# Altium PCB Pallette_Rev1.PcbDoc
Units mil, origin at the board's own origin, x right, y up, seen from the top; angles counter-clockwise.
Board outline 3092.52 x 629.92 mil, 2 copper layers (Top Layer, Bottom Layer); 40 components, 24 nets, 233 pads, 125 vias.
Unrouted connection lines stored in the file: 13.
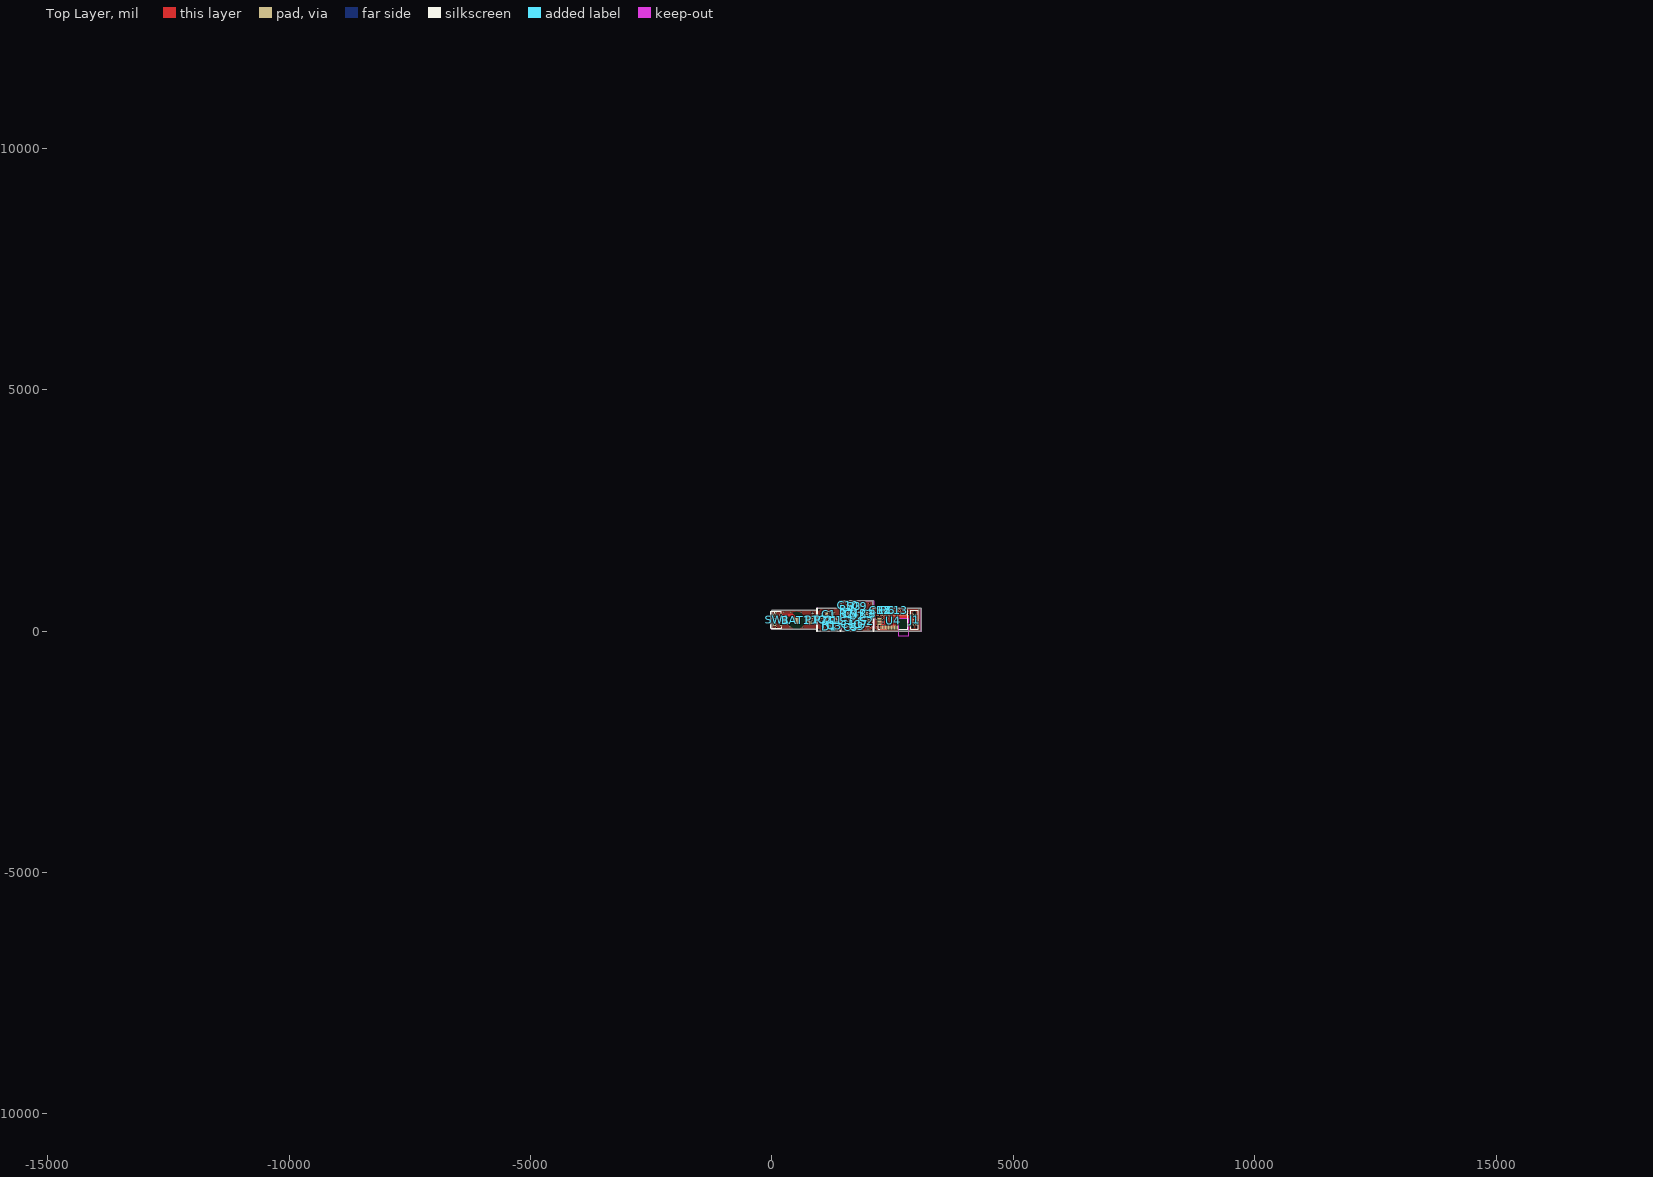
[diagram p0: Top Layer view]
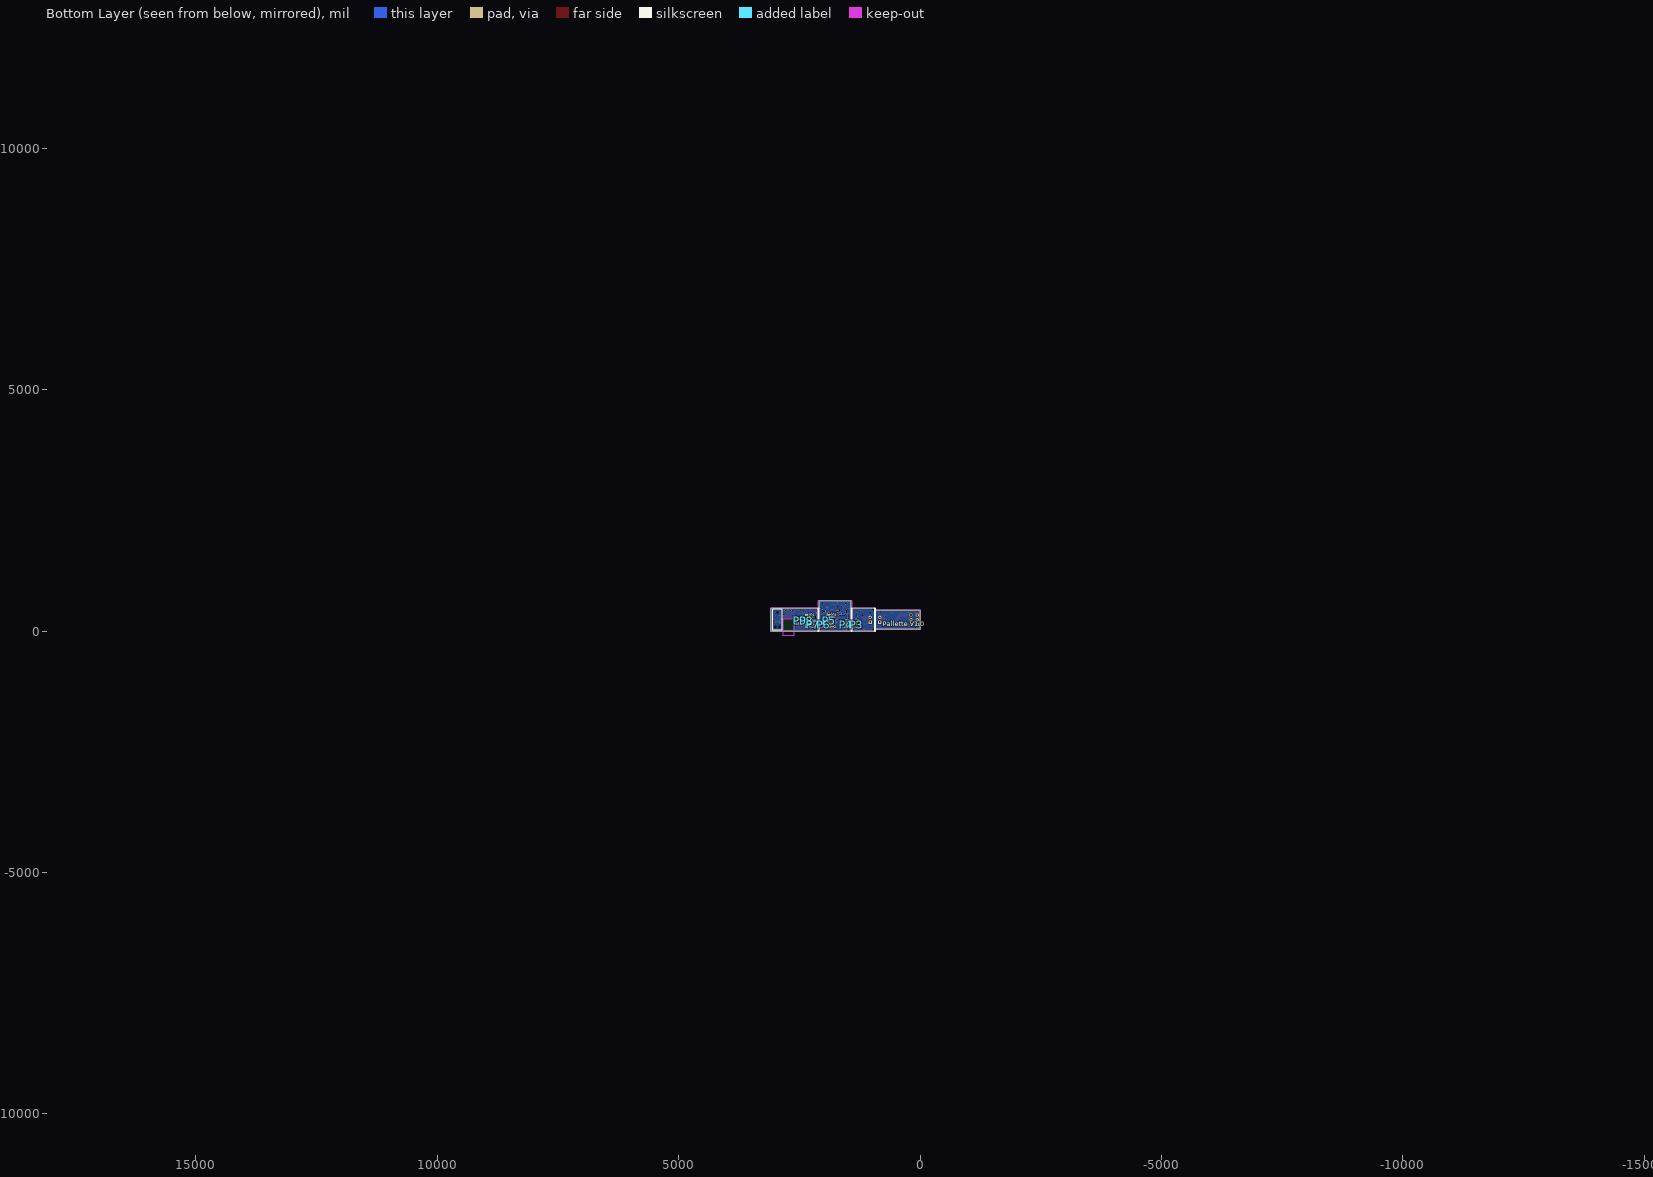
[diagram p1: Bottom Layer view, seen from below]

## Layer stack, top to bottom
Top Solder: solder mask 0.4, Solder Resist, Dk 3.5
Top Layer: signal copper 1.4
Dielectric 1: dielectric 12.6, FR-370HR, Dk 4.8
Bottom Layer: signal copper 1.4
Bottom Solder: solder mask 0.4, Solder Resist, Dk 3.5

## Board outline
0,39.37 0,433.07 934.06,433.07 934.06,472.44 1438.31,472.44 1438.31,629.92 2087.6,629.92 2087.6,472.44 3092.52,472.44 3092.52,0 934.06,0 934.06,39.37

## Design rules (kind name [scope] priority, off if disabled: settings)
Clearance Clearance_BAT [HasFootprintPad('BAT RETAINER 13', '2')] p1: gap=102.36
Clearance [All] p2: gap=4.92
ComponentClearance [All] p1: gap=3.94 collisioncheckmode=3 verticalgap=3.94 showdistances=FALSE
MinimumSolderMaskSliver [All] p1: minsoldermaskwidth=4.92
PolygonConnect PolygonConnect_Vias [IsVia] p1: connectstyle=Direct reliefconductorwidth=10 reliefentries=4 polygonreliefangle="90 Angle" airgapwidth=10
PolygonConnect [All] p2: connectstyle=Relief reliefconductorwidth=10 reliefentries=4 polygonreliefangle="90 Angle" airgapwidth=5
RoutingVias [All] p1: holewidth=5 width=15.75 viastyle="Through Hole" minholewidth=4 minwidth=15 maxholewidth=28 maxwidth=50
SolderMaskExpansion [All] p1: expansion=4
Width [All] p1: maxlimit=100 minlimit=5 preferedwidth=10
28 further rules are at their usual default settings.

## Components (designator, comment, footprint, x,y, rotation, side; value= is the part's Value field where it differs from the comment)
BAT1 "RETAINER COIN CELL 7.9MM" "BAT RETAINER 13" 507.88,226.38 r0 top
C1 "100uF" 1411 1191.93,348.43 r0 top
C2 "10uF" 0603 1116.14,235.24 r90 top
C3 "22uF" 0603 1298.23,109.25 r90 top
C4 "100nF" 0402 1660.43,357.28 r270 top
C5 "100nF" 0402 1646.57,82.76 r180 top
C6 "22uF" 0603 1609.25,362.2 r270 top
C7 "100nF" 0402 1853.35,141.73 r90 top
C8 "22uF" 0603 2020.67,362.2 r270 top
C9 "100nF" 0402 1830.71,520.67 r90 top
C10 "22uF" 0603 1576.77,539.37 r270 top
C11 "100nF" 0402 1667.4,141.81 r270 top
C12 "100nF" 0402 2246.06,437.01 r0 top
C13 "100nF" 0402 2591.54,437.01 r180 top
D1 "SML-D12V1WT86" "LED 0603" 1193.9,90.55 r180 top
J1 "HEADER PROG" TC2050-IDC-NL 2955.71,236.22 r270 top
L1 "10uH" 0805 1328.74,223.43 r270 top
P1 "HEADER M TH RA" "PORT PW TH 2P" 835.63,236.22 r0 top
P2 "HEADER F TH RA" "PORT PW TH 2P" 1032.48,236.22 r0 top
P3 "HEADER PW SMT" "PORT PW SMT 2P" 1314.96,136.22 r180 bottom
P4 "HEADER PW SMT" "PORT PW SMT 2P" 1531.5,136.22 r180 bottom
P5 "CONN 6P" "PORT CONN 6P" 1883.86,211.22 r180 bottom
P6 "HEADER PW SMT" "PORT PW SMT 2P" 1990.16,136.22 r180 bottom
P7 "HEADER PW SMT" "PORT PW SMT 2P" 2207.68,136.22 r180 bottom
P8 "CONN 6P" "PORT CONN 6P" 2345.47,211.22 r180 bottom
P9 "CONN 4P" "PORT CONN 4P" 2483.27,211.22 r180 bottom
R1 "220R" 0603 1192.91,134.84 r180 top
R2 "30R" 0402 1563.98,362.21 r90 top
R3 "30R" 0402 1976.38,362.21 r90 top
R4 "30R" 0402 1558.07,457.68 r180 top
R5 "4.7K" 0402 2322.83,437.01 r180 top
R6 "4.7K" 0402 2407.48,437.01 r0 top
S1 "Si1141-M01" SI1141-M01 1562.99,204.72 r0 top
S2 "Si1141-M01" SI1141-M01 1962.6,204.72 r0 top
S3 "Si1141-M01" SI1141-M01 1704.13,511.81 r90 top
SW1 "SW DPDT TH RA" "SW DPDT TH RA" 122.05,236.22 r270 top
U1 "XC9265A221MR-G" SOT-25 1220.47,222.44 r0 top
U2 "SN74LVC125A" VQFN14 1767.72,313.98 r0 top
U3 "SPW0430HR5HB-B" MIC-4P 1759.84,106.3 r90 top
U4 "BLE113-A-M256K" BLE113-A 2511.81,219.49 r270 top

## Footprints (in the part's own frame and the unit in brackets; to place one, negate y for a bottom-side part, rotate by r counter-clockwise, add the part's x,y. Pads: shape width x height; smd on the part's side, far side on the other; paste and mask are expansions set on the pad)
0402 [mm] "Body 1.0x0.5mm, IPC High Density"
  rect 0.6x0.7 smd: 1(-0.55,0) 2(0.55,0)
  silkscreen extent -0.5,-0.5 0.5,0.5, body extent -0.55,-0.3 0.55,0.3, height 1.3
0603 [mm] "Body 1.6x0.8mm, IPC High Density"
  rect 0.8x0.8 smd: 1(-0.8,0) 2(0.8,0)
  silkscreen extent -0.4,-0.55 0.4,0.55, body extent -0.81,-0.46 0.81,0.46, height 1.3
0805 [mm] "Body 2.0x1.25mm, IPC High Density"
  rect 1x1.2 smd: 1(-1,0) 2(1,0)
  silkscreen extent -0.5,-0.75 0.5,0.75, body extent -1.02,-0.65 1.02,0.65, height 1.3
1411 [mm] "Body 3.5x2.8mm, IPC High Density"
  rect 1.6x2.7 smd: 1(-1.5,0) 2(1.5,0)
  silkscreen extent -1,-1.5 1,1.5, body extent -1.52,-1.4 1.52,1.4, height 1.3
"BAT RETAINER 13" [mm] "Body 13.36x7.36mm"
  rect 2.03x3.18 smd: 0(-5.665,0) 1(5.665,0)
  round 4 smd paste-6 mask+2.45: 2(0,0)
  silkscreen extent -6.93,-1.83 6.93,1.83, body extent -6.68,-3.15 6.68,4.21, height 5.75
BLE113-A [mm] "Body 15.725x9.15mm"
  rrect50% 2.1x0.5 smd: 1(-3.775,7.075)
  rect 2.1x0.5 smd: 2(-3.775,6.275) 3(-3.775,5.475) 4(-3.775,4.675) 5(-3.775,3.875) 6(-3.775,3.075) 7(-3.775,2.275) 8(-3.775,1.475) 9(-3.775,0.675) 10(-3.775,-0.125) 11(-3.775,-0.925) 12(-3.775,-1.725) 13(-3.775,-2.525) 14(-3.775,-3.325) 15(-3.775,-4.125) 16(-3.775,-4.925) 17(-3.775,-5.725) 18(-3.775,-6.525) 25(3.775,-6.525) 26(3.775,-5.725) 27(3.775,-4.925) 28(3.775,-4.125) 29(3.775,-3.325) 30(3.775,-2.525) 31(3.775,-1.725) 32(3.775,-0.925) 33(3.775,-0.125) 34(3.775,0.675) 35(3.775,1.475) 36(3.775,2.275)
  rect 0.5x2.1 smd: 19(-2,-7.175) 20(-1.2,-7.175) 21(-0.4,-7.175) 22(0.4,-7.175) 23(1.2,-7.175) 24(2,-7.175)
  Keep-Out Layer region: -1.075,2.75 8.025,2.75 8.025,8.25 -1.075,8.25
  silkscreen extent -5.43,-7.98 4.57,7.78, body extent -4.57,-7.97 4.57,7.75, height 1.9
"LED 0603" [mm] "Body 1.6x0.8mm"
  rect 0.8x0.8 smd: 1(-0.825,0) 2(0.825,0)
  silkscreen extent -0.5,-0.55 0.5,0.55, body extent -0.8,-0.4 0.8,0.4, height 0.65
MIC-4P [mm] "Body 2.5x3.1mm"
  rect 0.79x0.55 smd: 1(-0.625,1.045) 2(-0.625,-1.045) 3(0.625,-1.045) 4(0.625,1.045)
  silkscreen extent -1.88,-1.55 1.25,1.55, body extent -1.25,-1.55 1.25,1.55, height 1.25
"PORT CONN 4P" [mm] "Body 4.75x2mm"
  oval 2x0.95 smd paste-10: 1(0,1.905) 2(0,0.635) 3(0,-0.635) 4(0,-1.905)
"PORT CONN 6P" [mm] "Body 7.2x2mm"
  oval 2x0.95 smd paste-10: 1(0,3.175) 2(0,1.905) 3(0,0.635) 4(0,-0.635) 5(0,-1.905) 6(0,-3.175)
"PORT PW SMT 2P" [mm] "Body 3.75x2mm"
  oval 2x1.2 smd paste-10: 1(0,1.27) 2(0,-1.27)
"PORT PW TH 2P" [mm] "Body 5.08x2.54mm"
  round 1.8 hole 1: 1(0,1.27)
  rect 1.8x1.8 hole 1: 2(0,-1.27)
  body extent -1.27,-2.54 1.27,2.54, height 2.54
SI1141-M01 [mm] "Body 4.9x2.85mm"
  rrect50% 1.35x0.65 smd: 1(-1.2,2)
  rect 1.35x0.65 smd: 2(-1.2,1) 3(-1.2,0) 4(-1.2,-1) 5(-1.2,-2) 6(1.2,-2) 7(1.2,-1) 8(1.2,0) 9(1.2,1) 10(1.2,2)
  silkscreen extent -2.3,-2.48 1.43,2.8, body extent -1.43,-2.45 1.43,2.45, height 1.3
SOT-25 [mm] "Body 2.9x2.8mm"
  rrect50% 1.35x0.65 smd: 1(-1.2,0.95)
  rect 1.35x0.65 smd: 2(-1.2,0) 3(-1.2,-0.95) 4(1.2,-0.95) 5(1.2,0.95)
  silkscreen extent -1.78,1.62 -1.52,1.88, body extent -0.8,-1.45 0.8,1.45, height 1.3
"SW DPDT TH RA" [mm] "Body 9x5.6mm"
  round 1.7 hole 0.9: 1(-2.5,1.65) 1(-2.5,-1.65) 2(0,1.65) 2(0,-1.65) 3(2.5,1.65) 3(2.5,-1.65)
  silkscreen extent -4.5,-3.77 4.5,1.83, body extent -4.5,-3.77 4.5,1.83, height 3.22
TC2050-IDC-NL [mil] "Programming pads"
  round 0 hole 39 unplated: 0(-150,0) 0(150,-40) 0(150,40)
  round 31 smd paste-50: 1(-100,-25) 2(-50,-25) 3(0,-25) 4(50,-25) 5(100,-25) 6(100,25) 7(50,25) 8(0,25) 9(-50,25) 10(-100,25)
  silkscreen extent -200,-80 200,80
VQFN14 [mm] "Body 3.65x3.65mm"
  rect 2.05x2.05 smd: 0(0,0)
  rect 0.85x0.28 smd mask+0.05: 1(-1.725,-0.75)
  oval 0.28x0.85 smd mask+0.05: 2(-1,-1.725) 3(-0.5,-1.725) 4(0,-1.725) 5(0.5,-1.725) 6(1,-1.725) 9(1,1.725) 10(0.5,1.725) 11(0,1.725) 12(-0.5,1.725) 13(-1,1.725)
  oval 0.85x0.28 smd mask+0.05: 7(1.725,-0.75) 8(1.725,0.75) 14(-1.725,0.75)
  silkscreen extent -2.5,-1.83 1.82,1.83, body extent -1.83,-1.82 1.83,1.83, height 1

## Part data
BAT1: library part "BAT RETAINER 13", "RETAINER COIN CELL 7.9MM SMD"
C1: library part "CAP Pol 100uF", "CAP TANT POLY 100UF 8V 1411"
C2: library part "CAP 10uF", "CAP CER 10UF ±20% 10V X5R 0603"
C3 C6: library part "CAP 22uF", "CAP CER 22UF 6.3V X5R 0603"
C4 C5 C7 C9 C11 C12 C13: library part "Cap 100nF", "CAP CER 0.1UF 10V X5R 0402"
C8 C10: library part "Cap 22uF", "CAP CER 22UF 6.3V X5R 0603"
D1: library part "LED SML-D12V1WT86", "LED Red 630nm 2.2V Diffused White Lens 0603"
J1: "PADS PROGRAMMING"
L1: library part "IND 10uH", "FIXED IND 10UH 500MA 320 MOHM"
P1: library part "HEADER PW TH MALE", "HEADER Male, Unshrouded, 2 Position, 0.100\", Through Hole, Right Angle, Gold"
P2: library part "HEADER PW TH FEMALE", "HEADER Female, 2 Position, 0.100\", Through Hole, Right Angle, Gold"
P3 P4 P6 P7: "Connection Port"
P5 P8: library part "HEADER CONN 6P", "Connection Port"
P9: library part "HEADER CONN 4P", "Connection Port"
R1: library part "RES 220R", "RES SMD 220 OHM 1% 1/10W 0603"
R2 R3 R4: library part "Res 30R", "RES SMD 30 OHM 1% 1/16W 0402"
R5 R6: library part "Res 4.7K", "RES SMD 4.7K OHM 1% 1/16W 0402"
S1 S2 S3: library part "SENS Si1141-M01", "SENS IR PROXIMITY AMB LT 10QFN"
SW1: library part "SW DPDT", "SW Slide Switch DPDT Through Hole, Right Angle"
U1: library part "VR XC9265A221MR-G", "IC REG BUCK 2.2V 0.2A SYNC SOT25"
U2: library part "BUFF SN74LVC125A", "IC BUS BUFF TRI-ST QD 14VQFN"
U3: library part "MIC SPW0430HR5HB-B", "MIC MEMS ANALOG OMNI"
U4: library part "uC BLE113", "MODULE BT 4.0 BLE113 OTA"

## Free pads (board coordinates)
  round 0 hole 118.11 unplated: 0(934.06,0) 0(934.06,472.44) 0(1423.23,0) 0(2102.36,0)
  round 10 on Drill Drawing: 1(-14528.58,-10332.83) 1(-14528.58,-4732.44) 1(-14528.58,867.95) 1(-14528.58,6468.35) 1(-14528.58,12068.74) 1(-14016.77,-9821.02) 1(-14016.77,-4732.44) 1(-9174.25,11556.93) 1(-9174.25,12068.74) 1(-3819.92,11556.93) 1(-3819.92,12068.74) 1(1534.41,11556.93) 1(1534.41,12068.74) 1(6888.74,11556.93) 1(6888.74,12068.74) 1(9469.45,-9466.69) 1(9469.45,-8876.14) 1(9469.45,-8324.96) 1(11140.71,-9338.74) 1(11140.71,-9132.05) 1(11140.71,-7685.2) 1(11901.17,-8324.96) 1(11910.39,-9466.69) 1(11910.84,-8876.14) 1(11984.41,-9079.13) 1(11994.88,-9566.1) 1(11994.88,-8112.6) 1(12243.07,12068.74) 1(12479.38,-9566.1) 1(12479.38,-9081.6) 1(13206.13,-9808.35) 1(15900.59,-9543.7) 1(15904.49,-9566.1) 1(15904.49,-9081.6) 1(17082.13,-9566.1) 1(17082.13,-8112.6) 1(17085.59,-9821.02) 1(17085.59,-4732.44) 1(17085.59,867.95) 1(17085.59,6468.35) 1(17089.41,-9079.13) 1(17597.4,-10332.83) 1(17597.4,-4732.44) 1(17597.4,867.95) 1(17597.4,6468.35) 1(17597.4,12068.74)
  round 30 on Drill Drawing: 1(9469.45,-7380.08)

## Via types
v1: diameter 29.53, hole 14.96, Top Layer to Bottom Layer, tented both sides, 121 vias
v2: diameter 27.56, hole 27.56, Top Layer to Bottom Layer, tented bottom, 4 vias

## Nets (pads, with @x,y where several pads share a name; then routed paths per layer and width w, separated by ;. In a path a pad name is that pad's centre, name@x,y a point inside that pad or via, vN(x,y) a via of type N, cw(c..) or ccw(c..) an arc to the next point about the centre after c; other vN are vias at no path point)
+2V2: C3.2 C4.2 C5.2 C7.2 C9.2 C11.1 C12.2 C13.2 J1.2 L1.2 P3.1 P4.1 P6.1 P7.1 R2.2 R3.2 R4.2 R5.2 R6.2 S1.4 S1.6 S1.7 S2.4 S2.6 S2.7 S3.4 S3.6 S3.7 U1.4 U2.14 U3.4 U4.8 U4.17 | length 2917.9
  Top Layer w10: U4.8@2569.88,330.71 2583.74,316.85 2870.08,316.85 ; 2870.47,316.85 2901.1,286.22 J1.2
  Top Layer w19.68: S1.4@1516.73,165.35 S1.7 S1.6 ; v1@1536.42,438.98 R4.2 ; S1.7@1611.22,165.35 C11.1@1668.31,165.35 ; C5.2@1625,80.71 S1.6@1625,124.02 ; C4.2 1668.31,343.5 U2.14@1708.66,343.5 ; C11.1@1669.67,164.97 1669.29,165.35 S2.7@2004.92,165.35 ; U3.4 1718.7,165.16 ; S3.4 1743.5,542.32 C9.2 1842.52,542.32 v1@1975.39,409.45 ; S2.6@1993.11,125.98 S2.7@1993.11,165.35 ; C12.2 R5.2 ; v1@2286.42,310.04 U4.17@2286.42,364.17 ; U4.17 2286.42,435.04 ; R6.2@2429.13,428.15 C13.2@2569.88,428.15 ; U4.8 C13.2@2569.88,428.15 ; C13.2 C13.2@2569.88,428.15 ; C13.2@2571.85,428.15 C13.2@2569.88,428.15 ; J1.2@2929.33,286.22 J1.2
  Bottom Layer w19.68: v1(1338.58,140.75) P3.1@1338.58,187.01 ; P4.1@1501.97,186.22 1501.97,333.45 v1(1540.58,372.07) 1576.04,336.61 v1@1683.07,336.61 ; v1(1528.54,431.1) 1537.63,422.01 v1@1537.63,380.92 ; v1(1976.38,407.48) 2008.86,375 P6.1@2008.86,185.04 ; P7.1@2218.5,186.02 2218.5,233.27 v1(2291.34,306.1) ; v1@2290.35,308.07 2290.35,350.08 2315.27,375 2405.51,375 v1(2462.6,432.09)
  other v1: 1967.52,165.35 1567.91,166.34 1683.07,324.8
GND: C1.2 C2.1 C3.1 C4.1 C5.1 C6.1 C7.1 C8.1 C9.1 C10.1 C11.2 C12.1 C13.1 D1.2 J1.1 P1.2 P2.2 P3.2 P4.2 P6.2 P7.2 S1.8 S2.8 S3.8 SW1.2 U1.2 U2.0 U2.7 U2.11 U2.12 U2.13 U3.2 U3.3 U4.1 U4.2 U4.3 U4.4 U4.5 U4.6 U4.7 U4.11 U4.12 U4.13 U4.18 U4.19 U4.20 U4.21 U4.25 U4.26 U4.27 U4.28 U4.29 U4.36 | length 2136
  Top Layer w10: U1.2@1173.23,222.36 U1.2 ; S1.8 1640.75,204.72 v1(1650.21,195.26) ; v1(1699.8,379.92) v1@1701.77,381.89 ; U2.13@1728.35,378.94 1728.35,353.35 v2(1748.03,333.66) ; U2.0@1748.03,312.99 U2.12@1748.03,380.91 ; U2.0@1757.87,284.45 U2.7@1825.79,284.45 ; U2.0 U2.11 ; v1@2222.44,335.63 U4.18@2252.95,335.63 ; v1@2222.44,400.59 U4.18@2252.95,400.59 ; v1@2231.3,38.39 U4.29@2381.89,38.39 ; 2239.17,103.35 U4.29@2381.89,103.35 ; U4.25 U4.26 U4.29 ; U4.13@2409.53,399.61 U4.11@2474.41,399.61 ; U4.13@2410.51,339.57 U4.11@2475.39,339.57 ; U4.13 U4.12 U4.11 U4.11@2475.39,338.58 ; U4.7@2596.45,373.03 2596.45,433.9 ; U4.7@2597.52,399.61 v1@2817.91,399.61 ; U4.7@2598.5,335.63 v1@2813.98,335.63 ; U4.7 U4.6 U4.5 U4.4 U4.3 U4.2 U4.1 ; 2615.16,399.61 C13.1@2615.16,429.06 ; U4.6@2636.81,371.14 v1@2636.81,432.01
  Top Layer w17.72: 1120.08,222.36 U1.2@1162.4,222.36
  Top Layer w19.68: C4.1@1661.42,379.92 v1(1699.8,379.92) ; v1@1701.77,381.89 U2.13 U2.12 U2.11@1762.79,381.89 ; S3.8@1703.74,569.88 v1(1703.74,603.35) ; v1@1706.69,513.78 S3.8@1706.69,547.24 ; 1976.38,204.72 S2.8 v1@2049.21,204.72
  Bottom Layer w10: 1947.01,65.24 P6.2@1966.02,84.25 ; 1948.98,105.23 P6.2@1967.99,86.22 ; P6.2@1971.93,86.22 P6.2
  other v1: 3041.34,36.42 1883.86,41.34 1990.16,41.34 2865.16,41.34 1298.31,42.24 2223.42,42.32 1531.5,43.31 1801.18,46.26 1668.31,47.24 1161.5,54.05 1262.79,77.76 91.54,78.74 374.02,78.74 641.73,78.74 1589.57,85.63 1473.42,86.61 1032.48,89.57 1125,91.54 2042.32,92.52 1367.13,105.31 2224.41,111.22 2168.31,115.16 1962.6,127.95 1562.99,129.92 1770.67,133.86 2598.42,134.84 728.35,137.8 277.56,141.73 1259.84,145.67 2895.67,149.61 1116.14,167.32 2403.54,194.88 2051.18,204.72 1366.14,223.43 1470.47,224.41 2860.24,224.41 1962.6,228.35 2165.35,234.25 3045.27,236.22 2562.01,244.09 2294.29,260.83 2165.35,266.73 2165.35,298.23 2427.17,306.1 728.35,314.96 1303.15,321.85 1198.82,323.82 2224.41,328.74 2892.71,333.66 2823.82,342.52 1484.25,358.27 2049.21,362.2 1609.25,366.14 2224.41,367.13 2918.31,372.05 1198.82,376.97 1303.15,376.97 2164.37,375.98 1032.48,387.8 832.68,391.73 86.61,393.7 248.03,393.7 393.7,393.7 610.24,393.7 1939.96,396.65 2822.83,398.62 2223.42,402.56 1250.98,421.26 2718.5,430.12 2754.92,430.12 2790.35,430.12 2020.67,431.1 2645.67,431.1 2682.09,431.1 2191.93,437.01 3043.31,437.99 1500,461.61 1823.82,465.55 1932.09,500 1710.63,510.83 1624.02,511.81 1539.37,569.88 1824.8,577.76 2018.7,577.76 1576.77,602.36
  other v2: 1748.03,294.29 1787.4,294.29 1787.4,333.66
MIC1: P5.6 P8.6 P9.1 U3.1 U4.33 | length 611.5
  Top Layer w10: U3.1 U3.1@1718.7,83.62 ; U3.1@1719.68,82.68 v1(1758.86,82.68) ; v1@2400.16,154.96 2461.54,216.34 2461.54,236.6 2476.98,252.05 2510.83,252.05 ; U4.33@2510.83,70.87 2511.22,71.27 2511.22,275.19 v1@2510.83,275.59
  Bottom Layer w10: v1(1758.86,82.68) P5.6@1863.19,82.68 ; P8.6 2356.62,86.22 2394.76,124.36 2394.76,150.67 v1(2399.61,155.51)
  other v1: 2519.69,276.57
MIC2: P9.2 U4.32 | length 157.5
  Top Layer w10: U4.32@2480.32,70.87 v1@2480.32,228.34
  other v1: 2486.54,225.4
NetBAT1_2: BAT1.2 SW1.1 | length 361.5
  Top Layer w70.87: SW1.1@187.01,334.84 408.6,334.84 BAT1.2@507.55,235.89
NetC6_2: C6.2 R2.1 S1.10 | length 81.7
  Top Layer w10: R2.1 C6.2@1599.41,340.55 ; S1.10 C6.2@1610.24,329.72
NetC8_2: C8.2 R3.1 S2.10 | length 91.5
  Top Layer w10: R3.1 C8.2@2010.83,340.55 ; S2.10 C8.2@2009.84,340.55
NetC10_2: C10.2 R4.1 S3.10 | length 118.6
  Top Layer w10: R4.1@1576.77,460.63 C10.2 ; C10.2@1576.77,501.97 S3.10@1625.39,550.59 ; S3.10@1625.39,556.5 S3.10
NetD1_1: D1.1 R1.1 | length 42.3
  Top Layer w10: D1.1@1224.41,95.47 R1.1@1224.41,137.8
NetL1_1: L1.1 U1.5
PROG_DC: J1.3 U4.9 | length 470.5
  Top Layer w10: U4.9 2538.38,329.73 2566.54,301.57 2864.17,301.57 ; 2864.64,301.57 J1.3@2930.35,235.87 ; J1.3@2929.01,236.22 J1.3
PROG_DD: J1.4 U4.10 | length 536.8
  Top Layer w10: U4.10 2506.89,331.69 2551.93,286.65 2858.27,286.65 ; 2858.46,286.65 2905.29,239.83 2905.29,211.64 J1.4
R\E\S\E\T\: J1.7 U4.34 | length 757
  Top Layer w10: U4.34@2533.46,92.52 2533.46,254.46 2550.73,271.73 2852.28,271.73 2890.36,233.65 2890.36,193.3 v1@2899.6,184.06 ; J1.7 v1@3017.52,186.22
  Bottom Layer w10: v1(2892.71,186.02) v1(3017.71,186.02)
S1_EN: P5.3 P8.3 U2.4 U4.24 | length 376.8
  Top Layer w10: v1@1761.81,210.63 1767.72,216.53 U2.4@1767.72,247.05 ; U4.24 2311.49,140.75 2332.76,162.02 2332.76,182.47 2332.68,182.55 v1@2332.68,225.39
  Bottom Layer w10: v1@1761.81,210.63 1787.71,184.74 1810.72,184.74 P5.3@1862.7,236.71 ; P8.3@2326.77,229.33 2330.71,233.27 P8.3@2330.71,236.22 ; P8.3@2326.77,236.22 P8.3@2330.71,236.22 ; P8.3@2330.71,239.17 P8.3@2330.71,236.22 ; P8.3@2344.49,236.22 P8.3@2330.71,236.22
  other v1: 1762.05,210.64 2324.8,225.39
S1_SCL: S1.3 U2.6 | length 410.3
  Top Layer w10: S1.3@1532.34,206.83 v1@1566.79,241.28 ; v1@1648.86,232.05 1648.86,231.61 1694.45,186.02 1753.73,186.02 ; 1753.8,185.96 1774.25,185.96 ; 1774.31,186.02 1810.04,186.02 1827.76,203.74 1827.76,236.22 1817.42,246.56 U2.6@1807.58,246.56
  Bottom Layer w10: v1(1563.98,245.08) 1641,245.08 v1(1656.73,229.34)
S2_EN: P5.4 P8.4 U2.10 U4.23 | length 485.9
  Top Layer w10: U2.10@1787.4,382.87 1787.4,395.25 1801.68,409.53 1841.46,409.53 1861.22,389.76 v1(1861.22,375) ; U4.23 v1@2299.21,172.24
  Bottom Layer w10: v1@1865.16,375.98 1880.91,391.73 1909.45,391.73 1934.06,367.13 1934.06,221.65 P5.4@1898.62,186.22 ; v1@2299.21,172.24 P8.4@2313.19,186.22
  other v1: 2307.53,172.24
S2_SCL: S2.3 U2.8 | length 188
  Top Layer w10: U2.8@1835.63,344.49 1847.44,344.49 1863.19,328.74 1863.19,243.11 1863.06,242.98 1901.32,204.72 S2.3
S3_EN: P5.5 P8.5 U2.1 U4.22 | length 435.8
  Top Layer w10: U2.1 1700.04,284.21 v1(1700.04,263.79) ; U4.22@2230.31,204.72 v1@2289.37,204.72
  Bottom Layer w10: v1@1701.03,266.75 1689.88,255.6 1689.88,221.53 1704.6,206.82 1730.19,206.82 1770.67,166.34 1835.63,166.34 1854.33,147.64 P5.5@1854.33,130.91 ; v1@2282.48,205.71 2282.48,161.39 P8.5@2317.9,125.97
  other v1: 2292.32,206.69
S3_SCL: S3.3 U2.3 | length 385.2
  Top Layer w10: 1660.43,267.17 1684.06,243.55 1684.06,217.52 1699.8,201.77 1725.1,201.77 1737.37,214.04 1737.37,221.62 U2.3@1748.03,232.28 ; 1660.43,269.14 1660.43,295.28 1635.83,319.88 1635.83,394.69 1642.72,401.57 1674.02,401.57 1696.85,424.4 1696.85,443.25 S3.3@1704.13,450.54
SCL: P5.2 P8.2 R6.1 U2.2 U2.5 U2.9 U4.14 | length 526
  Top Layer w10: v1@1787.4,221.92 U2.5@1787.4,247.05 ; U2.9 v1@1830.71,381.89 ; v1(2375,298.23) 2380.9,304.14 U4.14 R6.1@2380.9,432.09
  Bottom Layer w10: v1@1712.16,235.55 1773.77,235.55 v1@1797.1,212.22 ; v1@1796.39,210.76 P5.2@1870.08,284.45 ; v1(1827.76,383.86) 1834.57,377.05 1834.57,324.36 1872.71,286.22 P5.2@1898.62,286.22
  other v1: 1796.5,211.63 1714.81,232.3
SDA: P5.1 P8.1 R5.1 S1.2 S2.2 S3.2 U4.15 | length 1072.6
  Top Layer w10: S1.2@1533.46,244.09 1533.46,250.98 1556.1,273.62 1556.1,307.09 1512.71,350.48 1512.71,379.44 1559.46,426.18 v1@1665.35,426.18 ; v1(1721.46,418.31) 1789.36,418.31 1795.5,424.45 1847.64,424.45 1898.62,373.46 v1@1898.62,354.33 ; v1@1902.56,357.28 1878.11,332.83 1878.11,271.06 1905.07,244.09 S2.2 ; R5.1@2349.41,432.09 U4.15 2349.41,288.91 2377.5,260.82 v1@2394.68,260.82
  Bottom Layer w10: v1(1664.37,427.17) 1712.6,427.17 v1(1721.46,418.31) ; P8.1 P8.1@2379.18,336.22 ; P8.1@2379.18,329.33 2399.68,308.82 2399.68,264.84 v1(2395.67,260.82)
  other v1: 1898.62,366.14
SW1: P9.3 U4.31 | length 114
  Top Layer w10: U4.31@2442.01,72.76 U4.31 ; U4.31@2449.88,68.82 v1@2449.88,180.12
  other v1: 2454.72,174.21
SW2: P9.4 U4.30 | length 116.7
  Top Layer w10: U4.30@2416.34,70.87 v1@2416.34,133.86
  Bottom Layer w10: v1@2424.21,130.91 P9.4@2477.95,130.91
  other v1: 2424.21,129.92
VBAT: BAT1.1 C1.1 C2.2 P1.1 P2.1 R1.2 U1.1 U1.3 | length 294.9
  Top Layer w10: R1.2@1161.42,137.8 U1.3@1161.42,184.06 ; U1.3 1189.23,185.04 1209.73,205.54 1209.73,239.35 1189.23,259.84 U1.1
  Top Layer w70.87: BAT1.1@733.07,234.06 785.43,286.42 P1.1@835.83,286.42 ; P1.1 P1.1@835.96,286.55
pads on no net: BAT1.0 J1.0 J1.5 J1.6 J1.8 J1.9 J1.10 S1.1 S1.5 S1.9 S2.1 S2.5 S2.9 S3.1 S3.5 S3.9 SW1.3 U4.16 U4.35

## Polygon pours and split planes (outlines as drawn)
GND on Bottom Layer "Bottom Layer-GND" (solid, remove dead copper, pour order 22): -203.74,718.5 7629.37,718.5 7629.37,-284.69 -203.74,-284.69
GND on Top Layer "Top Layer-No Net" (solid, remove dead copper, pour order 26): -169.29,778.54 -169.29,-242.15 7686.06,-242.15 7686.06,778.54 4916.49,778.54

## Keep-outs
Keep-Out Layer:
  lines w10: 934.06,0 2102.36,0 ; 934.06,39.37 0,39.37 0,433.07 934.06,433.07 ; 1423.23,629.92 2102.36,629.92 ; 2102.36,433.07 2102.36,472.44 ; 2108.27,0 3092.52,0 3092.52,472.44 2102.36,472.44 ; 934.06,433.07 934.06,472.44 ; 934.06,433.07 934.06,472.44 ; 934.06,472.44 1423.23,472.44 ; 1423.23,472.44 1423.23,472.44 ; 2102.36,472.44 2102.36,472.44
  lines w39.37: 1423.23,0 1423.23,629.92 ; 2102.36,0 2102.36,629.92 ; 934.06,0 934.06,472.44 934.06,0

## Other copper
Top Layer:
  rectangle net VBAT: 1100.39,246.06 1199.8,302.17
  rectangle net VBAT: 1100.39,288.39 1164.37,299.21
  rectangle net NetL1_1: 1237.2,241.14 1354.33,284.45
  rectangle net +2V2: 1237.2,166.34 1354.33,205.71
  rectangle net VBAT: 1033.46,265.75 1135.83,321.85
  rectangle net +2V2: 1279.53,121.06 1354.33,174.21

## Silkscreen, mask and mechanical layers (free items; w line width, h text height)
Top Overlay:
  lines w39.37: 934.06,0 934.06,472.44 ; 1423.23,0 1423.23,472.44 ; 2102.36,0 2102.36,472.44
Bottom Overlay:
  lines w39.37: 934.06,0 934.06,472.44 ; 1423.23,0 1423.23,472.44 ; 2102.36,0 2102.36,472.44
  text "SDA" at 1838.58,318.31 h23.62
  text "SDA" at 2299.21,318.9 h23.62
  text "SCL" at 1838.58,269.09 h23.62
  text "SCL" at 2299.21,269.69 h23.62
  text "M1" at 2599.41,267.72 h23.62
  text "Vcc" at 1347.44,219.49 h23.62
  text "Vcc" at 1563.98,219.49 h23.62
  text "Vcc" at 2022.64,219.49 h23.62
  text "Vcc" at 2240.16,219.49 h23.62
  text "S1" at 1838.58,218.9 h23.62
  text "S1" at 2299.54,218.5 h23.62
  text "M2" at 2599.41,217.52 h23.62
  text "SW1" at 2599.41,170.28 h23.62
  text "S2" at 1838.58,168.7 h23.62
  text "S2" at 2299.54,167.32 h23.62
  text "S3" at 1838.58,120.08 h23.62
  text "S3" at 2299.54,118.11 h23.62
  text "SW2" at 2599.41,118.11 h23.62
  text "GND" at 1351.38,117.13 h23.62
  text "GND" at 1567.91,117.13 h23.62
  text "GND" at 2026.57,117.13 h23.62
  text "GND" at 2244.09,117.13 h23.62
  text "Pallette V1.0" at 776.57,98.43 h98.43
  text "MIC1" at 1837.6,68.9 h23.62
  text "M1" at 2299.54,68.11 h23.62
Board Outline:
  lines w10: 0,39.37 0,433.07 934.06,433.07 934.06,472.44 1438.31,472.44 1438.31,629.92 2087.6,629.92 2087.6,472.44 3092.52,472.44 3092.52,0 2108.27,0 934.06,0 934.06,39.37 0,39.37
V-Score:
  lines w7.87: 934.06,-196.85 934.06,669.29 ; 1423.23,-196.85 1423.23,669.29 ; 2102.36,-196.85 2102.36,669.29
  text "V-Score" at 955.71,-629.92 h60 r90
  text "V-Score" at 1447.83,-629.92 h60 r90
  text "V-Score" at 2125.98,-637.8 h60 r90
Drill Drawing:
  drawing of 315 lines, arcs and shapes, not listed
  text "6" at -11784.45,11692.52 h393.7
  text "5" at -6512.8,11692.52 h393.7
  text "4" at -1178.15,11692.52 h393.7
  text "3" at 4073.82,11692.52 h393.7
  text "2" at 9510.83,11692.52 h393.7
  text "1" at 14943.9,11692.52 h393.7
  text "NOTES:" at -13862.2,11204.33 h393.7
  text "MANUFACTURING FILE LIST" at 11691.93,11137.4 h275.59
  text "FABRICATION.ZIP." at -7201.77,10936.61 h196.85
  text "Pallette" at -8423.23,10935.23 h196.85
  text "1. THIS DRAWING IS TO BE USED IN CONJUNCTION WITH FILE:" at -13901.57,10928.74 h196.85
  text "MASTER FABRICATION DRAWING" at -2662.4,10909.06 h590.55
  text "_Rev1_" at -7807.09,10907.48 h196.85
  text "FABRICATION FILES" at 11691.93,10889.37 h196.85
  text "FILE NAME" at 14565.94,10889.37 h196.85
  text "Pallette" at 14590.76,10666.73 h196.85
  text "_Rev1" at 15244.51,10657.09 h196.85
  text "2. MANUFACTURING PROCESS: TO IPC-6012B (UNLESS OTHERWISE STATED)." at -13901.57,10653.15 h196.85
  text "TOP OVERLAY" at 11691.93,10653.15 h196.85
  text ".GTO" at 15830.35,10652.17 h196.85
  text "Pallette" at 14590.55,10437.6 h196.85
  text "_Rev1" at 15246.06,10418.9 h196.85
  text "TOP SOLDER MASK" at 11691.93,10416.93 h196.85
  text ".GTS" at 15827.76,10413.98 h196.85
  text "VIEWED FROM PRIMARY SIDE (LAYER 1)" at -1776.57,10387.4 h393.7
  text "3. ACCEPTANCE: TO IPC-A-600H CLASS 2 (UNLESS OTHERWISE STATED)." at -13901.57,10377.56 h196.85
  text "Pallette" at 14590.55,10197.44 h196.85
  text "TOP COPPER LAYER (L1)" at 11691.93,10180.71 h196.85
  text "_Rev1" at 15246.06,10178.74 h196.85
  text ".GTL" at 15834.27,10171.91 h196.85
  text "4. FINISHED PCB THICKNESS: 0.014\"" at -13901.57,10101.97 h196.85
  text "Pallette" at 14590.55,9953.35 h196.85
  text "_Rev1" at 15246.06,9953.74 h196.85
  text "BOTTOM COPPER LAYER (L2)" at 11691.93,9940.55 h196.85
  text ".GBL" at 15834.27,9931.75 h196.85
  text "5. MATERIAL TYPE: ISOLA PCL-FR-370HR" at -13891.73,9781.5 h196.85
  text "_Rev1" at 15246.06,9723.43 h196.85
  text "Pallette" at 14590.55,9713.19 h196.85
  text "BOTTOM SOLDER MASK" at 11691.93,9704.33 h196.85
  text ".GBS" at 15834.27,9695.53 h196.85
  text "_Rev1" at 15246.06,9483.27 h196.85
  text "6. LAYER CONSTRUCTION ARE SHOWN IN VIEW 'A'." at -13885.83,9476.38 h196.85
  text "Pallette" at 14590.55,9473.03 h196.85
  text "BOTTOM OVERLAY" at 11691.93,9468.11 h196.85
  text ".GBO" at 15831.69,9449.41 h196.85
  text "_Rev1" at 15229.33,9258.86 h196.85
  text "Pallette" at 14589.57,9244.69 h196.85
  text ".GM12" at 15817.53,9238.84 h196.85
  text "V-SCORE DRAWING" at 11694.88,9235.83 h196.85
  text "7. SURFACE FINISH:" at -13901.57,9157.09 h196.85
  text "ELECTROLESS NICKEL/IMMERSION GOLD (ENIG) AS PER IPC-4552," at -12120.08,9156.5 h196.85
  text "D" at -14375,9129.53 h393.7
  text "D" at 17235.24,9129.53 h393.7
  text "Pallette" at 14581.69,9017.32 h196.85
  text ".GKO" at 15809.66,9011.48 h196.85
  text "_Rev1" at 15217.52,9010.43 h196.85
  text "KEEPOUT" at 11710.63,8997.05 h196.85
  text "MINIMUM EN / IG THICKNESS TO BE 3um / 0.05um." at -13711.61,8872.05 h196.85
  text "_Rev1" at 15240.16,8789.37 h196.85
  text "Pallette" at 14595.47,8768.31 h196.85
  text ".APR" at 15819.5,8762.46 h196.85
  text "APERTURE FILE" at 11696.85,8759.45 h196.85
  text "8. ALL HOLE SIZES DESCRIBED IN THIS DOCUMENT ARE FINISHED HOLE SIZES (FHS)." at -13916.34,8617.72 h196.85
  text "_Rev1" at 15235.24,8532.48 h196.85
  text "Pallette" at 14595.47,8528.15 h196.85
  text ".DRR" at 15819.5,8526.24 h196.85
  text "DRILL REPORT - TOOL FILE" at 11696.85,8523.23 h196.85
  text "9. MINIMUM CONDUCTOR WIDTH = 0.005\", MINIMUM CONDUCTOR SPACING = 0.005\"." at -13913.39,8356.3 h196.85
  text "Pallette" at 14599.41,8330.32 h196.85
  text "_Rev1" at 15235.24,8323.43 h196.85
  text "-Plated.TXT" at 15772.64,8319.88 h177.17
  text "DRILL - PLATED" at 11704.72,8309.65 h196.85
  text "_Rev1" at 15180.12,8085.63 h177.17
  text "Pallette" at 14598.43,8082.68 h177.17
  text "-NonPlated.TXT" at 15669.29,8082.68 h177.17
  text "DRILL - NONPLATED" at 11704.72,8073.43 h196.85
  text "10. WHITE LPI SOLDER MASK OVER BARE COPPER ON PRIMARY AND SECONDARY SIDE," at -13916.34,8066.54 h196.85
  text "Pallette" at 14599.41,7850 h196.85
  text "_Rev1" at 15235.24,7843.11 h196.85
  text ".DRL" at 15827.38,7840.22 h196.85
  text "DRILL - BINARY FILE" at 11704.72,7837.2 h196.85
  text "SOLDER MASK TO CONFORM TO IPC-SM-840D CLASS T." at -13635.83,7820.87 h196.85
  text "Drill Drawing" at 14602.36,7603.35 h196.85
  text ".PDF" at 15701.77,7593.5 h196.85
  text "FABRICATION DRAWING" at 11691.93,7575.39 h196.85
  text "11. SILKSCREEN ON BOTH SIDES. SILKSCREEN COLOUR: BLACK" at -13916.34,7554.72 h196.85
  text "REMOVE ALL SILKSCREEN WITHIN 0.006\" OF EXPOSED CONDUCTORS." at -13688.98,7302.17 h196.85
  text "12. MARK VENDOR LOGO, DATE CODE, COUNTRY OF MANUFACTURE, ETC LOCATION AT" at -13916.34,7042.91 h196.85
  text "ASSEMBLY FILES" at 11654.53,6900.59 h196.85
  text "VENDOR DISCRETION USING WHITE EPOXY INK." at -13621.06,6810.63 h196.85
  text "_Rev1" at 15292.32,6659.06 h196.85
  text "Pallette" at 14591.54,6652.17 h196.85
  text ".GTP" at 15842.14,6650.26 h196.85
  text "TOP PASTE MASK" at 11692.91,6639.37 h196.85
  text "13. PROFILING METHODS: ROUTE AND/OR V-GROOVE/SCORE." at -13892.72,6556.69 h196.85
  text "_Rev1" at 15292.32,6418.9 h196.85
  text ".GBP" at 15842.14,6414.03 h196.85
  text "Pallette" at 14591.54,6412.01 h196.85
  text "BOTTOM PASTE MASK" at 11692.91,6403.15 h196.85
  text "14. 30 DEGREE (+/- 5 DEGREE) V-GROOVE/SCORE, MINIMUM 0.02\" (+/-0.004\") THICKNESS MUST REMAIN." at -13892.72,6281.1 h196.85
  text "_Rev1" at 16045.28,6185.04 h157.48
  text ".CSV" at 16485.24,6181.1 h157.48
  text "Pick Place for Pallette" at 14591.54,6179.72 h157.48
  text "PICK PLACE FILE" at 11692.91,6166.93 h196.85
  text "15. ALL PCB EDGES SHALL BE CLEAN CUTS AND WITHOUT METALLIC BURRS." at -13892.72,6005.51 h196.85
  text "_Rev1" at 15292.32,5946.46 h196.85
  text ".GM2" at 15842.14,5941.59 h196.85
  text "Pallette" at 14591.54,5939.57 h196.85
  text "TOP DESIGNATOR" at 11692.91,5930.71 h196.85
  text "16. REJECTS: MAXIMUM OF 25% X (CROSS) OUTS ALLOWED AT VENDOR COST." at -13892.72,5729.92 h196.85
  text "_Rev1" at 15288.39,5710.24 h196.85
  text "Pallette" at 14591.54,5707.28 h196.85
  text ".GM3" at 15842.14,5705.37 h196.85
  text "TOP VALUES" at 11692.91,5694.49 h196.85
  text "_Rev1" at 15284.45,5468.11 h196.85
  text "Pallette" at 14587.6,5465.16 h196.85
  text ".GM13" at 15838.2,5463.25 h196.85
  text "ASSEMBLY" at 11688.98,5452.36 h196.85
  text "17. ALL PCBs SUPPLIED ARE TO BE COMPLIANT TO RoHS / EU DIRECTIVE 2002/95/EC &" at -13890.75,5434.17 h196.85
  text "_Rev1" at 15284.45,5233.86 h196.85
  text "Pallette" at 14587.6,5230.91 h196.85
  text ".GM15" at 15838.2,5226.63 h196.85
  text "COURTYARD" at 11688.98,5218.11 h196.85
  text "OTHER SIMILAR LEGISLATION RESTRICTING THE USE OF HAZARDOUS SUBSTANCES." at -13597.44,5196.38 h196.85
  text "_Rev1" at 15280.51,4995.67 h196.85
  text "Pallette" at 14583.66,4992.72 h196.85
  text ".GM16" at 15834.27,4990.81 h196.85
  text "DATUM CROSS" at 11685.04,4979.92 h196.85
  text "18. MANUFACTURING TOLERANCES:" at -13890.75,4925.32 h196.85
  text "Assembly Drawings" at 14589.57,4767.32 h196.85
  text ".PDF" at 16277.56,4756.89 h196.85
  text "ASSEMBLY DRAWING" at 11690.94,4754.53 h196.85
  text "GENERAL MANUFACTURING: +/- 0.004\"" at -13591.54,4649.72 h196.85
  text "Bill of Materials" at 14591.54,4529.13 h196.85
  text ".PDF" at 15917.32,4525.59 h196.85
  text "BOM" at 11692.91,4516.34 h196.85
  text "CONDUCTOR WIDTH: > 0.004\" +/-20%, < 0.004\" +/- 20%" at -13591.54,4374.13 h196.85
  text "CONDUCTOR PATTERN REGISTRATION: +/- 0.004\"" at -13591.54,4102.48 h196.85
  text "SOLDERMASK PATTERN REGISTRATION: +/-0.00315\"" at -13591.54,3822.95 h196.85
  text "FINISHED PCB/PANEL ARRAY THICKNESS TOLERANCE: > +/-10%" at -13591.54,3547.36 h196.85
  text "C" at -14386.81,3519.29 h393.7
  text "C" at 17235.24,3519.29 h393.7
  text "GENERAL FILES" at 11691.93,3330.32 h196.85
  text "HOLE DIAMETER: PTH > 0.118\" +/-0.004\", 0.118\" - 0.004\" +/-0.00315\", 0.004\" +0.002\"/-0.004\"" at -13591.54,3271.77 h196.85
  text ".GM1" at 15834.27,3110.89 h196.85
  text "_Rev1" at 15279.53,3108.86 h196.85
  text "Pallette" at 14582.68,3106.89 h196.85
  text "BOARD OUTLINE" at 11691.93,3094.09 h196.85
  text "NPTH > 0.157\" +/-0.004\", < 0.157\" +0.002\"/-0.002\"" at -12024.61,3031.61 h196.85
  text ".GM10" at 15834.27,2874.66 h196.85
  text "_Rev1" at 15279.53,2868.7 h196.85
  text "Pallette" at 14582.68,2866.73 h196.85
  text "BOARD INFORMATION" at 11691.93,2857.87 h196.85
  text "HOLE LOCATION: +/-0.004\"" at -13591.54,2759.96 h196.85
  text "_Rev1" at 15279.53,2632.48 h196.85
  text "Pallette" at 14582.68,2630.51 h196.85
  text ".PcbDoc" at 15839.57,2627.56 h177.17
  text "ALTIUM PCB FILE" at 11691.93,2621.65 h196.85
  text "ROUTE: PTH/NPTH +/-0.005\"" at -13591.54,2484.37 h196.85
  text "_Rev1" at 15279.53,2392.32 h196.85
  text ".TXT" at 15837.6,2391.34 h196.85
  text "Pallette" at 14582.68,2390.35 h196.85
  text "READ ME FILE" at 11691.93,2385.43 h196.85
  text "V-GROOVE/SCORE ALIGNMENT: +/-0.005\"" at -13591.54,2208.78 h196.85
  text "B" at -14371.06,-1984.65 h393.7
  text "B" at 17243.11,-1984.65 h393.7
  text "VIEW 'A': STACKUP STRUCTURE" at -13679.13,-4181.5 h393.7
  text "FINISHED PCB/PANEL ARRAY THICKNESS: 0.014\"" at -13616.14,-4602.36 h196.85
  text "DIELECTRIC CONSTANT FOR FR4 CORE AND PrePREG: Er = 4.0 - 4.5." at -13616.14,-4914.37 h196.85
  text "0.014\" - 2 Layer Stackup" at -12841.54,-5591.93 h295.28
  text "LAYER 1 (PRIMARY SIDE)" at -9101.38,-5857.68 h196.85
  text "A" at -13658.46,-6320.28 h196.85
  text "HALOGEN FREE PCB 35um COPPER CLAD LAMINATE" at -9120.08,-6336.02 h196.85
  text "LAYER 2 (SECONDARY SIDE)" at -9111.22,-6802.56 h196.85
  text ".Legend" at 10396.65,-7255.31 h118.11
  text "A" at -14402.56,-7342.91 h393.7
  text "A" at 17219.49,-7342.91 h393.7
  text "MATERIALS & SPECIFICATIONS" at -13692.91,-7440.35 h393.7
  text "UNLESS OTHERWISE SPECIFIED" at 9532.48,-7500.39 h157.48
  text "ALL DIMENSIONS ARE IN INCH" at 9532.48,-7646.06 h157.48
  text "BY" at -123.03,-7756.3 h157.48 r90
  text "TOLERANCES ARE:" at 9531.33,-7792.52 h157.48
  text "A. BASE MATERIAL - 35um (1.0oz) Cu CLAD DOUBLE SIDED LAMINATE, MUST MEET IPC4101B/24 OR" at -13679.13,-7796.65 h196.85
  text "JZ" at 399.5,-7886.22 h236.22 r90
  text "DECIMALS" at 9532.48,-7961.02 h157.48
  text "ANGLES" at 10674.21,-7961.02 h157.48
  text "Pallette" at 12160.43,-7979.85 h688.98
  text "EQUIVALENT (MINIMUM Tg 135 AND Td 280 DEGREES C, SUITABLE FOR A LEAD FREE PROCESS)." at -13451.77,-8032.87 h196.85
  text "o" at 10875,-8043.7 h84.78
  text "+" at 9814.84,-8088.74 h101.75
  text ".X" at 9623.03,-8098.82 h157.48
  text "0.02" at 9945.87,-8102.76 h157.48
  text "5" at 10800.2,-8106.69 h157.48
  text "-" at 9814.84,-8167.48 h101.75
  text "+" at 9814.84,-8246.22 h101.75
  text ".XX" at 9536.42,-8283.86 h157.48
  text "0.01" at 9941.93,-8283.86 h157.48
  text "DESCRIPTION" at 12060.04,-8313.98 h196.85
  text "B. PrePREG MATERIAL - MATERIAL SELECTED TO MATCH THE ABOVE LAMINATE, PrePREG TO ICP4101B/24 OR" at -13669.29,-8318.31 h196.85
  text "-" at 9814.84,-8324.96 h101.75
  text "MATERIAL" at 9535.12,-8474.13 h157.48
  text "ECO No" at -123.03,-8551.57 h157.48 r90
  text "EQUIVALENT (MINIMUM Tg 135 AND Td 280 DEGREES C, SUITABLE FOR A LEAD FREE PROCESS)." at -13441.93,-8554.53 h196.85
  text "4" at 10228.27,-8740.63 h275.59
  text "5" at 10681.02,-8740.79 h275.59
  text "6" at 11138.78,-8742.4 h275.59
  text "Tongue Controlled Interface" at 12107.28,-8771.65 h393.7
  text "2 SHEETS MINIMUM BETWEEN BONDING LAYERS." at -13451.77,-8790.75 h196.85
  text "GLASS STYLE, RESIN FLOW AND GEL TIMES OPTIONAL." at -13441.93,-9026.97 h196.85
  text "FINISH" at 9535.12,-9029.13 h157.48
  text "DATE" at -119.09,-9118.5 h157.48 r90
  text "SIZE" at 12006.89,-9244.49 h196.85
  text "REV." at 15939.96,-9244.49 h196.85
  text "10" at 10625,-9254.92 h275.59
  text "11" at 11074.73,-9266.57 h275.59
  text "7" at 10233.27,-9268.11 h275.59
  text "DRAWN" at 13280.51,-9287.4 h236.22
  text "FIRST ISSUE" at 290.35,-9299.61 h236.22 r90
  text "C. 18um (0.5oz) Cu FOIL LAYERS TO IPC-MF-150F/3." at -13679.13,-9302.56 h196.85
  text "Aug 29th 2016" at 542.32,-9377.36 h236.22 r90
  text "REVISION" at -540.35,-9417.72 h393.7 r90
  text "A1" at 12475.39,-9464.96 h393.7
  text "1" at 16402.56,-9473.82 h236.22
  text "OUTER LAYERS TO BE PLATED TO 35um (1oz) FINISHED WEIGHT." at -13451.77,-9538.78 h196.85
  text "JZ" at 13369.09,-9681.1 h393.7
  text "08-29-2016" at 14037.4,-9687.01 h393.7
  text "1" at 455.71,-9705.12 h393.7 r90
  text "DO NOT SCALE DRAWING" at 9603.35,-9712.99 h196.85
  text "ISSUE" at -123.03,-9744.49 h157.48 r90
  text "SCALE" at 12006.89,-9756.3 h196.85
  text "1 : 1" at 12711.61,-9756.3 h196.85
  text "SHT" at 15955.71,-9756.3 h196.85
  text "1 OF 1" at 16443.9,-9756.3 h196.85
  text ".Print_Time" at 10625,-10157.87 h236.22
  text "DRAWING SIZE A1" at 15243.11,-10157.87 h236.22
  text ".Print_Date" at 12548.23,-10171.26 h236.22

## Dimensions
2087.6,629.92 to 3092.52,0 on Drill Drawing
0,433.07 to 0,39.37 on Drill Drawing
3092.52,472.44 to 2102.36,472.44 on Drill Drawing
2087.6,629.92 to 1438.31,629.92 on Drill Drawing
1423.23,472.44 to 934.06,472.44 on Drill Drawing
934.06,472.44 to 0,433.07 on Drill Drawing
3092.52,0 to 0,39.37 on Drill Drawing
3092.52,0 to 3092.52,472.44 on Drill Drawing

## Text inside footprints (layer, text, board x,y; h text height)
C1: Top Overlay "+" at 1065.95,368.11 h29.92
D1: Top Overlay "+" at 1266.73,100.39 h19.68 r180
P1: Top Overlay "+" at 815.94,344.49 h60
P2: Top Overlay "+" at 1012.8,344.49 h60